# EAGLE board mainBoard-new (EAGLE 9.5.2)
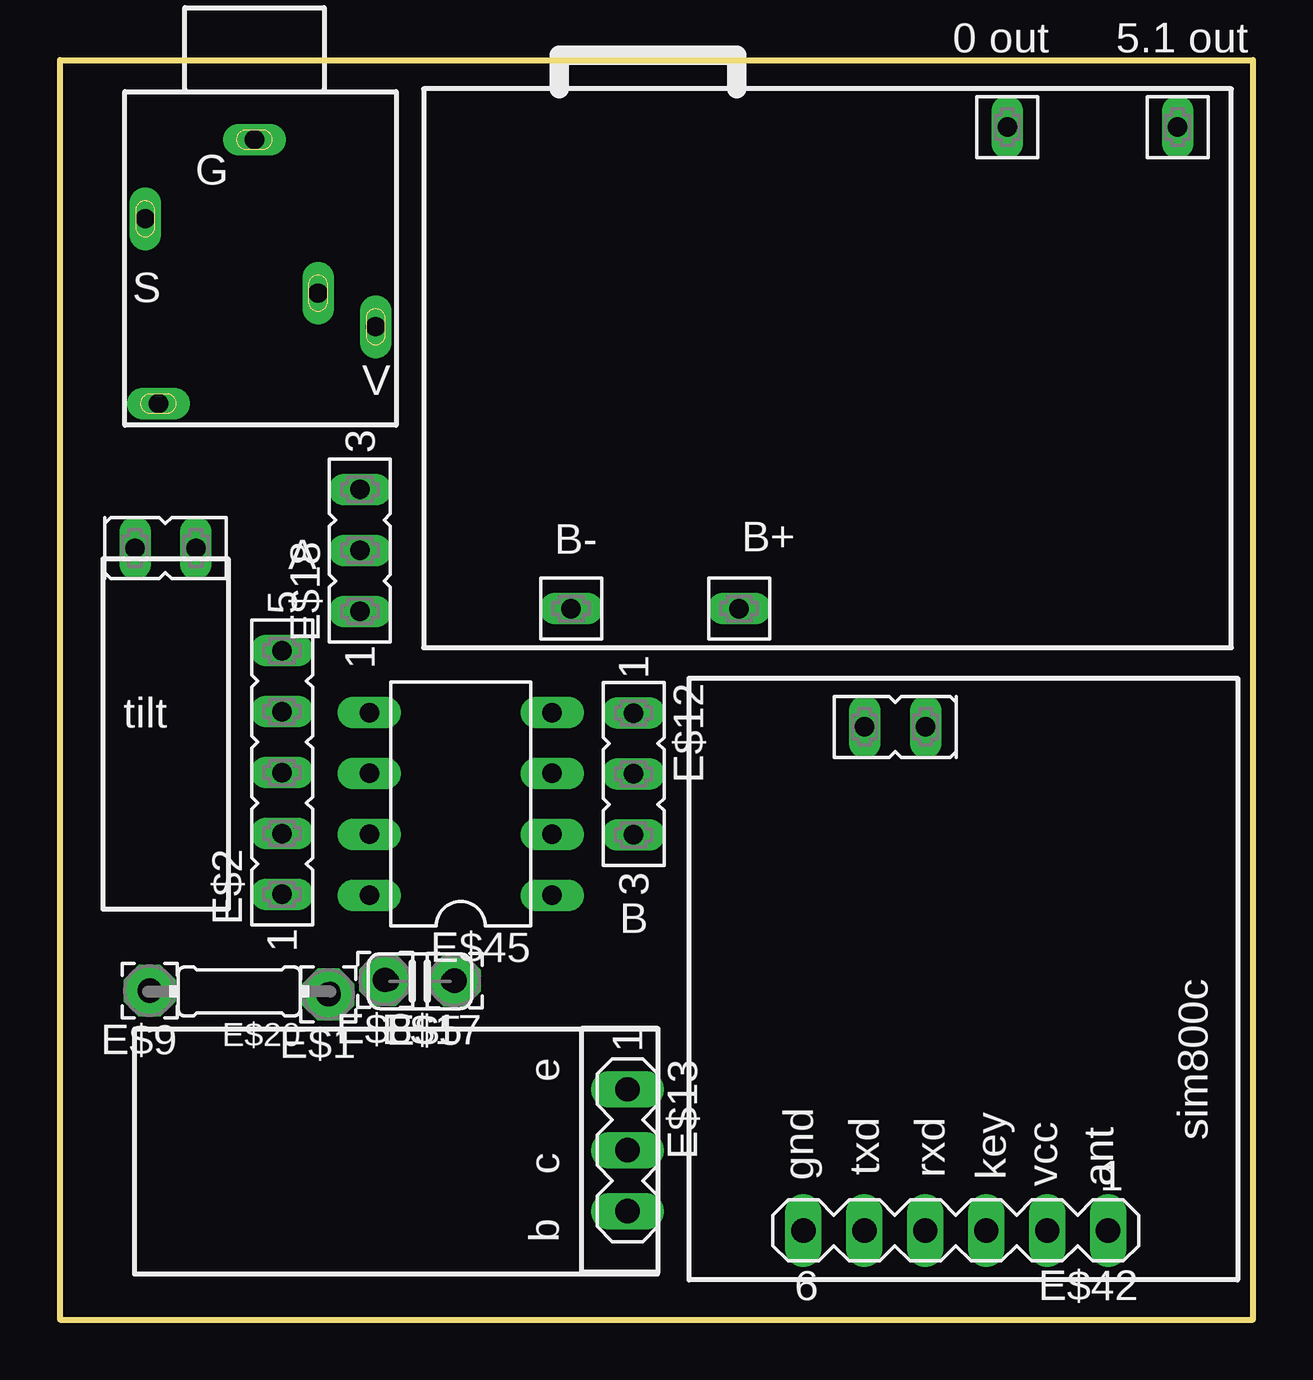
[diagram p0: board, top side]
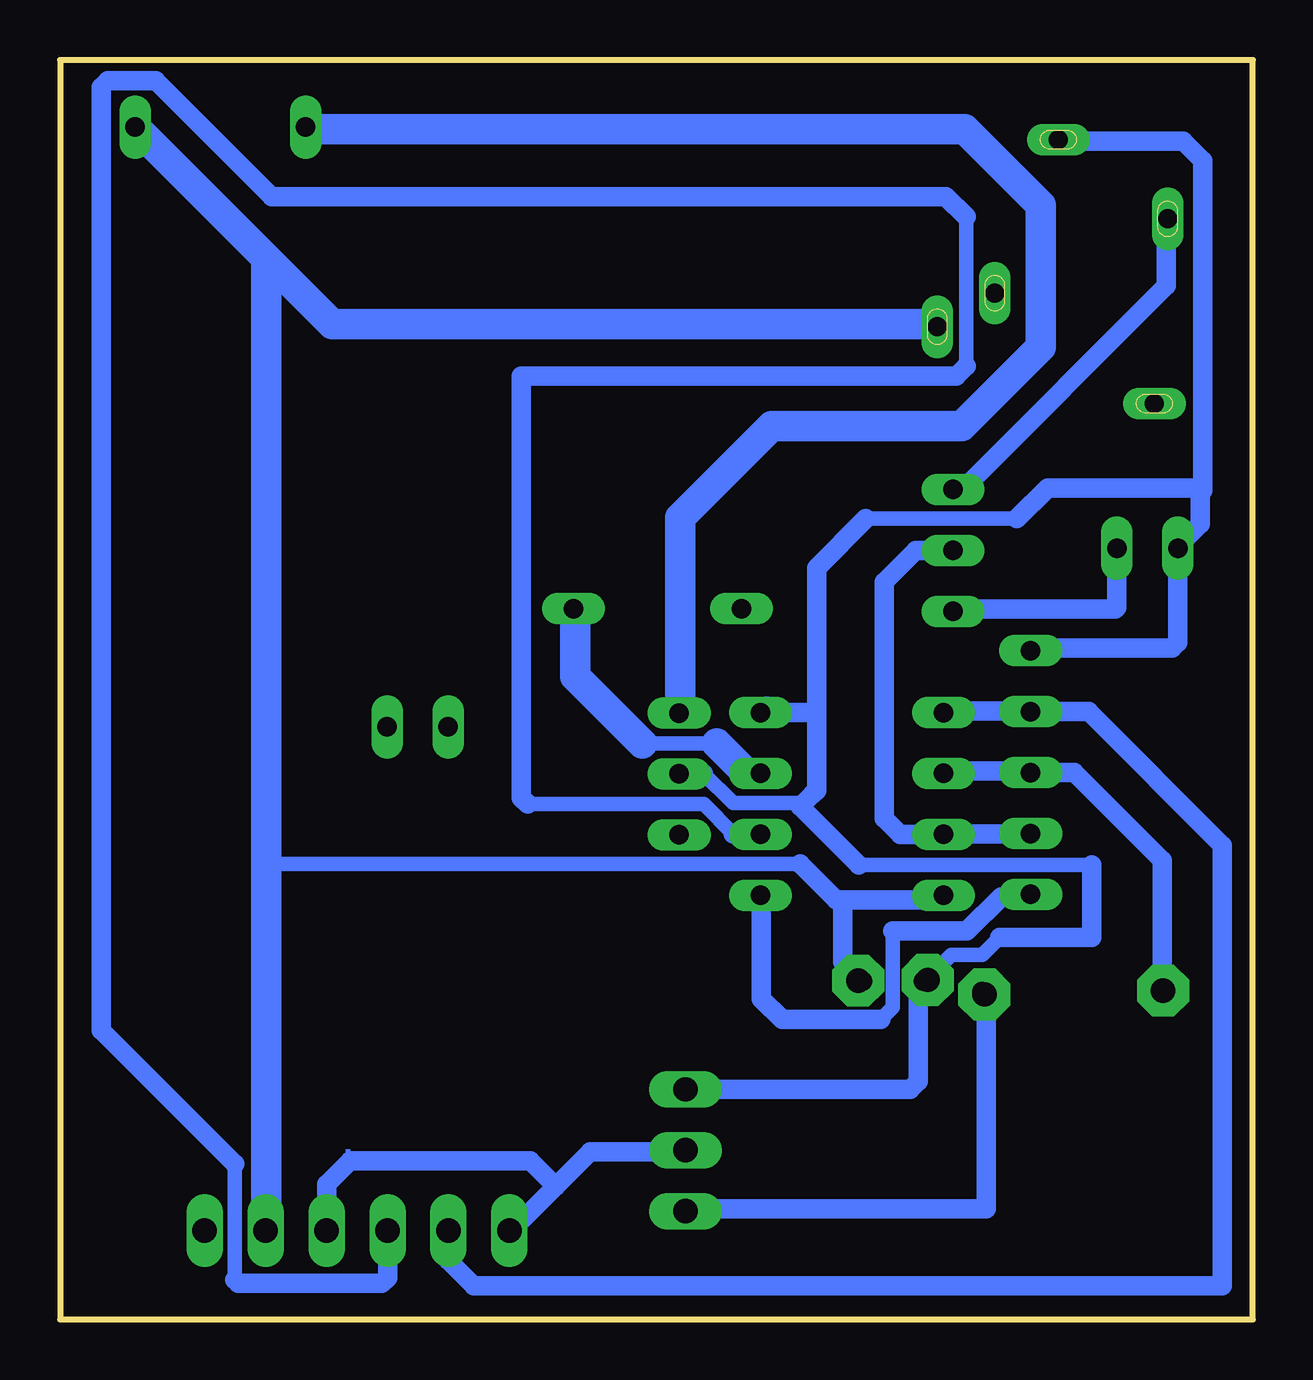
[diagram p1: board, bottom side, seen from below]

Size 49.7 x 52.5 mm. Coordinates in mm from the lower left corner, seen from the top.
Outline: 0,0 0,52.5 49.7,52.5 49.7,0 0,0
Copper layers (1*16): Top 0.035mm / dielectric 1.5mm / Bottom 0.035mm
Design rules "default": minimum track width 10mil, minimum drill 24mil, track to track 8mil, track to pad 8mil, pad to pad 8mil, via to via 8mil, smd to smd 8mil, copper to edge 40mil, drill to drill 8mil, minimum pad ring 10mil, minimum via ring 8mil, stop-mask expansion 4mil, vias tented up to drill 0mil, thermal gap 10mil

## Footprints (pad centres in the part's own frame; a part is rotated, then mirrored left to right if it is on the bottom)
2,15/1,0 = drill 1.016 pad 2.159 octagon: 1 0,0
FE05-1 = drill 0.813 long: 1 -5.08,0; 2 -2.54,0; 3 0,0; 4 2.54,0; 5 5.08,0
FE01-1 = drill 0.813 long: 1 -1.27,0
C025-024X044 = drill 0.813 octagon: 1 -1.27,0; 2 1.27,0
1503_09 = drill 0.8 pad 1.2 long: 1 0,-2.1; 2 -4.55,-5.4; 3 5.05,-9.9; 4 -4,-13.1; 5 2.65,-8.5
FE02-1 = drill 0.813 long: 1 -1.27,0; 2 1.27,0
FE03-1 = drill 0.813 long: 1 -5.08,0; 2 -2.54,0; 5 0,0
MA03-1 = drill 1.016 long: 1 -2.54,0; 2 0,0; 3 2.54,0
0204/7 = drill 0.813 octagon: 1 -3.81,0; 2 3.81,0
MA06-1 = drill 1.016 long: 1 -6.35,0; 2 -3.81,0; 3 -1.27,0; 4 1.27,0; 5 3.81,0; 6 6.35,0
DIL08 = drill 0.813 long: 1 -3.81,-3.81; 2 -1.27,-3.81; 3 1.27,-3.81; 4 3.81,-3.81; 5 3.81,3.81; 6 1.27,3.81; 7 -1.27,3.81; 8 -3.81,3.81

## Placement (x,y rotation side)
E$1  [2,15/1,0]  11.18,13.55 180 top
E$2  [FE05-1]  9.25,22.8 90 top
E$3  [FE01-1]  45.3,49.7 180 top
E$4  [FE01-1]  38.2,49.7 180 top
E$5  [C025-024X044]  15,14.1 180 top
E$7  [1503_09]  8.1,51.28 0 top
E$8  [2,15/1,0]  13.54,14.15 180 top
E$9  [2,15/1,0]  3.74,13.71 180 top
E$10  [2,15/1,0]  -19.2,4.4 180 top  (outside the outline)
E$11  [FE02-1]  4.4,32.16 180 top
E$12  [FE03-1]  23.9,20.2 270 top
E$13  TIP 122  [MA03-1]  23.65,7.05 270 top
E$14  [2,15/1,0]  -19,1 180 top  (outside the outline)
E$15  [FE01-1]  21.3,30.9 90 top
E$16  [FE01-1]  28.3,30.9 90 top
E$17  [2,15/1,0]  16.44,14.13 180 top
E$18  [FE03-1]  12.5,34.6 90 top
E$19  [FE02-1]  34.8,24.7 0 top
E$20  1k  [0204/7]  7.47,13.67 180 top
E$42  [MA06-1]  37.32,3.71 180 top
E$45  [DIL08]  16.7,21.49 90 top

## Library data of the parts
E$1 E$8-E$10 E$14 E$17 = wirepad
E$2 = con-lsta
E$3 E$4 E$11 E$12 E$15 E$16 E$18 E$19 = con-lsta2
E$5 = rcl
E$7 = con-lumberg
E$13 E$42 = con-lstb
E$20 = eagle-ltspice
E$45 = 74xx-us

## Nets
GROUND: E$4.1 E$12.1
S$2: E$16.1 E$45.3
S$3: E$2.4 E$42.5 E$45.5
S$4: E$2.5 E$5.2 E$7.1 E$11.2 E$12.2 E$13.1 E$45.4
S$5: E$2.3 E$20.2 E$45.6
S$7: E$2.1 E$45.1
S$8: E$11.1 E$18.1
S$9: E$2.2 E$18.2 E$45.7
S$10: E$7.2 E$18.5
S$11: E$13.3 E$20.1
S$14: E$13.2 E$42.3 E$42.6
S$15: E$3.1 E$5.1 E$7.3 E$42.2 E$45.8
S$16: E$42.4 E$45.2

## Tracks (layer width: path | path; a pad name or v marks a point on that pad's centre or on a via)
GROUND
  Bottom 0.813: 23.85,25.38 E$12.1 | 39.35,49.62 E$4.1
  Bottom 1.27: 23.85,25.38 23.85,33.43 20.05,37.23 12.14,37.23 8.83,40.54 8.83,46.46 12,49.62 39.35,49.62
S$2
  Bottom 0.61: 25.45,24.02 22.33,24.02
  Bottom 0.813: 21.19,22.88 20.6,22.88 E$45.3 | 28.23,29.62 E$16.1
  Bottom 1.27: 22.33,24.02 21.19,22.88 | 25.45,24.02 28.23,26.8 28.23,29.62
S$3
  Bottom 0.813: E$45.5 12.85,25.38 9.35,25.38 E$2.4 6.84,25.34 1.27,19.77 1.27,1.41 32.45,1.41 33.51,2.47 E$42.5
S$4
  Bottom 0.61: 22.89,22.77 21.65,21.53 18.7,21.53 | 9.83,33.38 16.13,33.38 | 16.42,18.95 6.7,18.95 | 10.54,15.93 11.28,15.19 12.57,15.19 13.66,14.1 E$5.2
  Bottom 0.813: E$12.2 23.87,22.77 22.89,22.77 | 18.35,21.88 18.18,22.05 18.18,25.3 | 18.35,21.88 18.85,21.38 16.42,18.95 | 18.35,21.88 18.7,21.53 | 18.18,25.3 E$45.4 20.24,25.57 | 2.18,34.56 2.18,33.17 3.1,32.25 E$11.2 3.12,28.23 3.35,28 9.23,28 E$2.5 | E$7.1 8.1,49.12 2.91,49.12 2.08,48.3 2.08,34.56 2.18,34.56 | 9.83,33.38 8.54,34.66 2.35,34.66 2.25,34.56 2.18,34.56 | 6.7,18.95 6.7,15.93 10.54,15.93 | 16.13,33.38 18.18,31.33 18.18,25.3 | E$5.2 13.95,13.88 13.95,9.92 14.28,9.59 E$13.1
S$5
  Bottom 0.813: E$20.2 3.77,13.9 3.77,19.13 7.44,22.8 E$2.3 9.35,22.88 12.85,22.88 E$45.6
S$7
  Bottom 0.61: 15,16.19 15,13.02 15.51,12.51
  Bottom 0.813: 15,16.19 11.91,16.19 10.48,17.62 9.35,17.62 E$2.1 | 15.51,12.51 19.61,12.51 20.48,13.38 20.48,17.62 E$45.1
S$8
  Bottom 0.813: E$11.1 5.67,29.69 5.73,29.62 12.48,29.62 E$18.1
S$9
  Bottom 0.813: E$2.2 9.35,20.25 12.85,20.25 E$45.7 14.7,20.22 15.36,20.88 15.36,30.74 14.04,32.06 E$18.2
S$10
  Bottom 0.813: E$18.5 12.09,34.6 3.6,43.09 3.6,45.88 E$7.2
S$11
  Bottom 0.813: E$20.1 11.1,13.69 11.1,4.62 23.6,4.62 E$13.3
S$14
  Bottom 0.813: 29.04,5.56 30.85,3.75 E$42.6 | 29.04,5.56 27.6,7 23.73,7 E$13.2 | E$42.3 38.59,5.63 37.6,6.62 30.1,6.62 29.04,5.56
S$15
  Bottom 0.61: 41.1,18.99 18.85,18.99
  Bottom 0.813: E$45.8 13.07,17.5 | 13.07,17.5 17.36,17.5 18.85,18.99 | 13.23,41.5 E$7.3 | 46.48,49.62 E$3.1 | 41.1,3.75 E$42.2 | 41.1,44.12 41.04,44.19 | E$5.1 17.08,14.91 17.08,17.5 13.07,17.5
  Bottom 1.27: 13.23,41.5 38.35,41.5 41.04,44.19 46.48,49.62 | 41.1,44.12 41.1,18.99 41.1,3.75
S$16
  Bottom 0.61: 21.65,20.25 22.89,21.48 30.21,21.48 | 11.94,45.97 11.94,39.74 | 42.42,1.65 42.42,6.48
  Bottom 0.813: 21.65,20.25 20.6,20.25 E$45.2 | 30.21,21.48 30.48,21.75 30.48,39.33 12.35,39.33 11.94,39.74 | 11.94,45.97 12.78,46.81 40.89,46.81 45.72,51.64 47.72,51.64 47.98,51.37 47.98,12.04 42.42,6.48 | 42.42,1.65 42.28,1.51 36.29,1.51 36.05,1.74 E$42.4
(copper drawn outside any net)
  shapes: Bottom area x1

## Text on the board
tPlace: 0 out | 5.1 out | G | switch tilt or external / interrupt | S | A | V | switch on off | B | A | B+ | B- | tilt | B | sim800c | e | gnd | txd | rxd | key | vcc | ant | c | b